# Altium PCB aucma_tranfer.PcbDoc
Units mm, origin at the board's own origin, x right, y up, seen from the top; angles counter-clockwise.
Board outline 96.43 x 140.34 mm, 2 copper layers (Top Layer, Bottom Layer); 69 components, 73 nets, 222 pads, 82 vias.
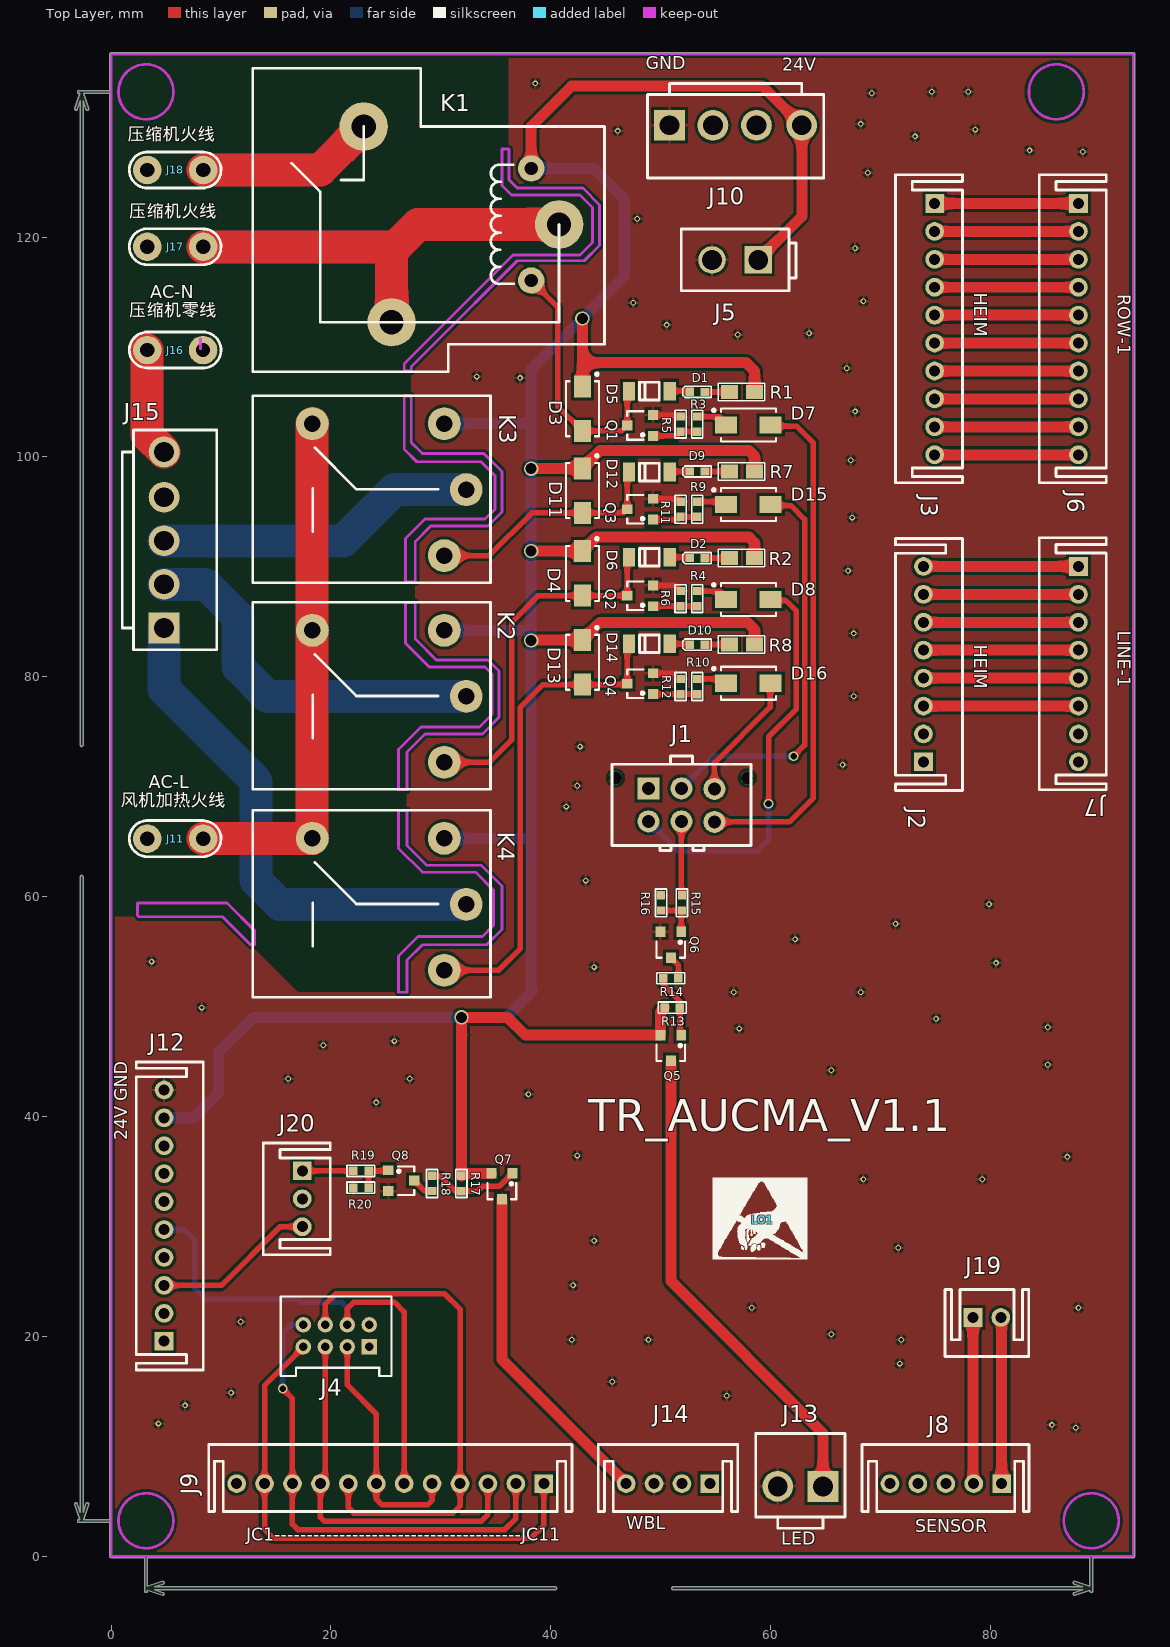
[diagram p0: Top Layer view]
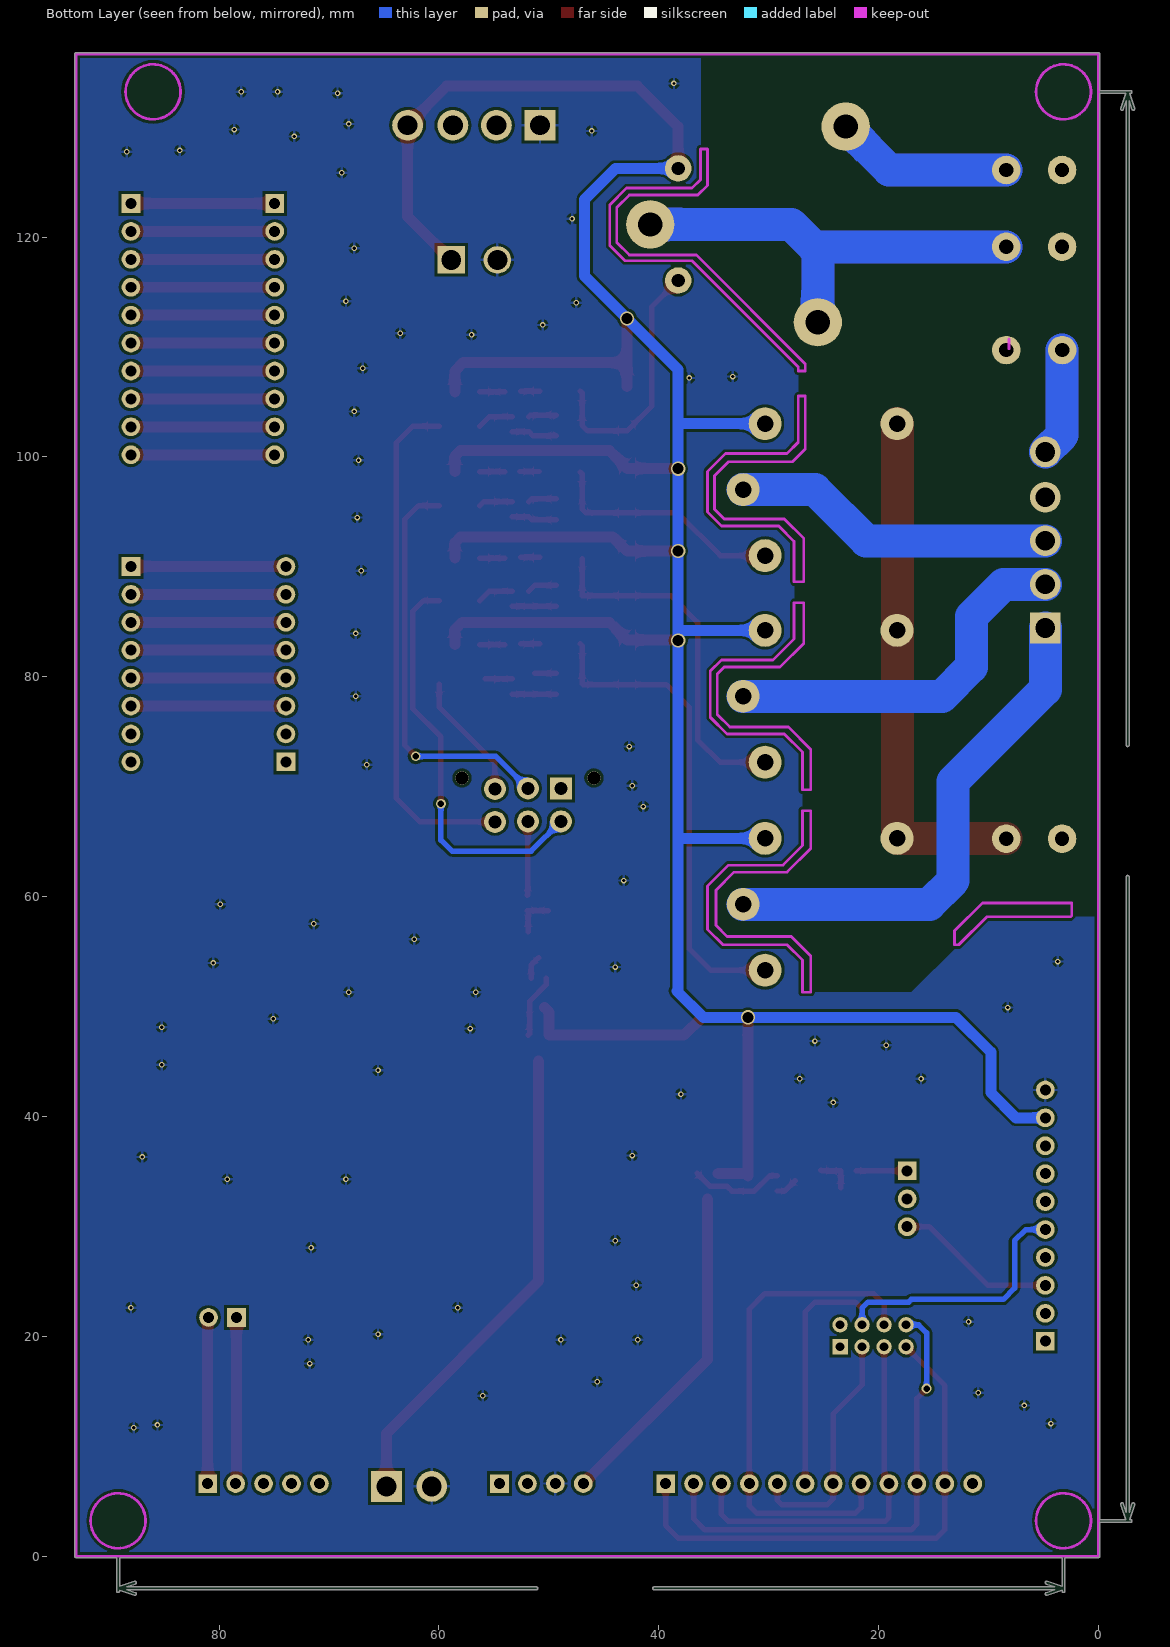
[diagram p1: Bottom Layer view, seen from below]

## Layer stack, top to bottom
Top Solder: solder mask 0.0102, Solder Resist, Dk 3.5
Top Layer: signal copper 0.0356
Dielectric 1: dielectric 0.32, FR-4, Dk 4.8
Bottom Layer: signal copper 0.0356
Bottom Solder: solder mask 0.0102, Solder Resist, Dk 3.5

## Board outline
-2.844,3.328 -3.296,4.685 cw(c-3.175,4.725) -3.054,4.765 -2.794,3.986 -2.794,61.802 cw(c-2.667,61.802) -2.54,61.802 -2.54,3.986 -2.28,4.765 cw(c-2.159,4.725) -2.032,4.725 cw(c-2.159,4.725) -2.038,4.685 -2.49,3.328 -0.127,3.328 -0.127,133.073 -2.49,133.073 -2.038,131.717 cw(c-2.159,131.677) -2.032,131.677 cw(c-2.159,131.677) -2.28,131.637 -2.54,132.416 -2.54,73.787 cw(c-2.667,73.787) -2.794,73.787 -2.794,132.416 -3.054,131.637 cw(c-3.175,131.677) -3.296,131.717 -2.844,133.073 -2.921,133.073 cw(c-2.921,133.201) -2.921,133.328 -0.127,133.328 -0.127,136.652 cw(c0,136.652) 0,136.779 93,136.779 cw(c93,136.652) 93.127,136.652 93.127,0 cw(c93,0) 93,-0.127 89.307,-0.127 89.307,-3.175 cw(c89.18,-3.175) 89.053,-3.175 89.053,-3.098 87.696,-3.55 cw(c87.656,-3.429) 87.616,-3.308 88.395,-3.048 51.129,-3.048 cw(c51.129,-2.921) 51.129,-2.794 88.395,-2.794 87.616,-2.534 cw(c87.656,-2.413) 87.696,-2.292 89.053,-2.744 89.053,-0.127 3.302,-0.127 3.302,-2.744 4.659,-2.292 cw(c4.699,-2.413) 4.826,-2.413 cw(c4.699,-2.413) 4.739,-2.534 3.96,-2.794 40.413,-2.794 cw(c40.413,-2.921) 40.541,-2.921 cw(c40.413,-2.921) 40.413,-3.048 3.96,-3.048 4.739,-3.308 cw(c4.699,-3.429) 4.826,-3.429 cw(c4.699,-3.429) 4.659,-3.55 3.302,-3.098 3.302,-3.175 cw(c3.175,-3.175) 3.048,-3.175 3.048,-0.127 0,-0.127 cw(c0,0) -0.127,0 -0.127,3.073 -2.921,3.073 cw(c-2.921,3.201) -2.921,3.328

## Design rules (kind name [scope] priority, off if disabled: settings)
Clearance [All] p1: gap=0.254
PolygonConnect [All] p1: connectstyle=Relief reliefconductorwidth=0.254 reliefentries=4 polygonreliefangle="90 Angle" airgapwidth=0.254
RoutingVias [All] p1: holewidth=0.3 width=0.5 viastyle="Through Hole" minholewidth=0.3 minwidth=0.5 maxholewidth=3.5 maxwidth=5
SolderMaskExpansion [All] p1: expansion=0.102
Width [All] p1: maxlimit=5 minlimit=0.254 preferedwidth=0.254
30 further rules are at their usual default settings.

## Components (designator, comment, footprint, x,y, rotation, side; value= is the part's Value field where it differs from the comment)
D1 "蓝色LED" 0603_D 53.34,105.918 r180 top
D2 "绿色LED" 0603_D 53.34,90.805 r180 top
D3 "SS34" SMA/DO214AC#1 42.883,104.394 r270 top
D4 "SS34" SMA/DO214AC#1 42.883,89.408 r270 top
D5 "1N4148" LL34_2P 48.133,106.172 r180 top
D6 "1N4148" LL34_2P 48.133,91.059 r180 top
D7 "1N4007" SMA/DO214AC#2 58.293,104.013 r180 top
D8 "1N4007" SMA/DO214AC#2 58.293,88.138 r180 top
D9 "红色LED" 0603_D 53.34,98.679 r180 top
D10 "黄色LED" 0603_D 53.34,82.931 r180 top
D11 "SS34" SMA/DO214AC#2 43.983,96.647 r90 top
D12 "1N4148" LL34_2P 48.133,98.806 r180 top
D13 "SS34" SMA/DO214AC#2 43.983,81.026 r90 top
D14 "1N4148" LL34_2P 48.133,83.185 r180 top
D15 "1N4007" SMA/DO214AC#2 58.293,96.774 r180 top
D16 "1N4007" SMA/DO214AC#2 58.293,80.518 r180 top
J1 "DIP-2*3" С5557-2*3A 48.895,69.85 r0 top
J2 "SIP-8-BLUE" XHB-8A 73.914,72.263 r90 top
J3 "SIP-10-BLUE" XHB-10A 74.93,123.063 r270 top
J4 "DIP-2*4" PHB-2*4A 18.161,14.097 r180 top
J5 "DIP-2*1" 5557-2*1A 54.864,117.983 r270 top
J6 "SIP-10" XHB-10A 88.011,123.063 r270 top
J7 "SIP-8" XHB-8A 88.011,90.043 r270 top
J8 "SIP-5-RED" XHB-5A 81.026,6.604 r180 top
J9 "SIP-12" XHB-12A 39.37,6.604 r180 top
J10 "SIP-4" VH3.96-4A 50.8,130.175 r0 top
J11 "SIP-2" "positioning crimp terminals" 3.302,65.278 r0 top
J12 "SIP-10-RED" XHB-10A 4.826,19.558 r90 top
J13 "SIP-2" VH3.96-2A 64.77,6.35 r180 top
J14 "SIP-4" XHB-4A 54.483,6.604 r180 top
J15 "SIP-5-RED" VH3.96-5A 4.826,100.457 r90 top
J16 "SIP-2" "positioning crimp terminals" 8.372,109.728 r180 top
J17 "SIP-2" "positioning crimp terminals" 3.302,119.126 r0 top
J18 "SIP-2" "positioning crimp terminals" 3.302,126.111 r0 top
J19 "SIP-2-BLUE" XHB-2A 78.613,21.717 r0 top
J20 "SIP-3" XHB-3A 17.399,35.052 r270 top
K1 "Relay-SPST" SLA-24VDC-SL-A 40.767,121.158 r90 top
K2 "Relay-SPST" HF152FD-1H 32.318,78.232 r180 top
K3 "Relay-SPST" HF152FD-1H 32.318,97.028 r180 top
K4 "Relay-SPST" HF152FD-1H 32.318,59.309 r180 top
LO1 "LOGO" THAND 59.309,30.607 r0 top
Q1 "BC817-40" SOT-23-3 48.133,102.87 r90 top
Q2 "BC817-40" SOT-23-3 48.133,87.376 r90 top
Q3 "BC817-40" SOT-23-3 48.133,95.25 r90 top
Q4 "BC817-40" SOT-23-3 48.133,79.375 r90 top
Q5 "AO3401" SOT-23-3 50.927,46.228 r180 top
Q6 "BC817-40" SOT-23-3 50.927,55.626 r180 top
Q7 "AO3401" SOT-23-3 35.56,33.655 r180 top
Q8 "BC817-40" SOT-23-3 26.416,34.163 r270 top
R1 "4.7KΩ/1%" 0805_R 56.261,105.918 r0 top
R2 "4.7KΩ/1%" 0805_R 56.261,90.805 r0 top
R3 "4.7KΩ/1%" 0603_R 53.34,102.997 r270 top
R4 "4.7KΩ/1%" 0603_R 53.34,87.122 r270 top
R5 "100KΩ/1%" 0603_R 51.816,102.997 r270 top
R6 "100KΩ/1%" 0603_R 51.816,87.122 r270 top
R7 "4.7KΩ/1%" 0805_R 56.261,98.679 r0 top
R8 "4.7KΩ/1%" 0805_R 56.261,82.931 r0 top
R9 "4.7KΩ/1%" 0603_R 53.34,95.25 r270 top
R10 "4.7KΩ/1%" 0603_R 53.34,79.121 r270 top
R11 "100KΩ/1%" 0603_R 51.816,95.25 r270 top
R12 "100KΩ/1%" 0603_R 51.816,79.121 r270 top
R13 "2.2KΩ/1%" 0603_R 51.054,49.911 r0 top
R14 "4.7KΩ/1%" 0603_R 50.927,52.578 r180 top
R15 "4.7KΩ/1%" 0603_R 51.943,59.436 r270 top
R16 "100KΩ/1%" 0603_R 50.038,59.436 r270 top
R17 "2.2KΩ/1%" 0603_R 31.877,33.909 r270 top
R18 "4.7KΩ/1%" 0603_R 29.21,33.909 r90 top
R19 "4.7KΩ/1%" 0603_R 22.733,35.052 r0 top
R20 "100KΩ/1%" 0603_R 22.733,33.528 r0 top

## Footprints (in the part's own frame and the unit in brackets; to place one, negate y for a bottom-side part, rotate by r counter-clockwise, add the part's x,y. Pads: shape width x height; smd on the part's side, far side on the other; paste and mask are expansions set on the pad)
0603_D [mil] "贴片发光二极管"
  rect 30x30 smd: 1(-27,0) 2(27.5,-0.06)
  silkscreen extent -50,-20 52,20
0603_R [mil] "电阻"
  rect 30x30 smd: 1(-27,0) 2(27.5,-0.06)
  silkscreen extent -50,-20 50,20
0805_R [mil] "电阻"
  rect 60x50 smd: 1(0.11,0.06) 2(90.11,0.06)
  silkscreen extent -39,-31 126,32
5557-2*1A [mm] "直针-引脚间距4.2mm"
  rect 2.5x2.5 hole 1.8: 1(0.051,4.013)
  round 2.5 hole 1.8: 2(0.051,-0.187)
  silkscreen extent -2.75,-2.99 2.85,7.44
HF152FD-1H [mm] "宏发功率继电器20A,1组常开"
  round 3 hole 1.5: 1(0,0) 2(14,-6) 3(2,6) 4(2,-6)
  silkscreen extent -2.2,-8.55 19.43,8.47
LL34_2P [mil]
  rect 44x66.93 smd: 1(-106,7) 2(40,7)
  silkscreen extent -68,-24 2,38
PHB-2*4A [mm] "直针-引脚间距2.0mm"
  rect 1.4x1.4 hole 0.8: 1(-5.334,-4.953)
  round 1.4 hole 0.8: 2(-3.334,-4.953) 3(-1.334,-4.953) 4(0.666,-4.953) 5(-5.334,-6.953) 6(-3.334,-6.953) 7(-1.334,-6.953) 8(0.666,-6.953)
  silkscreen extent -7.37,-9.53 2.72,-2.29
"positioning crimp terminals" [mm] "6.3mm带定位线路板冷压接插片"
  round 2.6 hole 1.3: 1(0,0) 2(5.08,0)
  silkscreen extent -1.64,-1.64 6.71,1.64
SLA-24VDC-SL-A [mm] "松乐功率继电器[常开A型]"
  round 4.4 hole 2.2: 1(8.9,17.78) 2(-8.9,15.24) 2(0,0)
  round 2.4 hole 1.2: 3(-5.1,2.54) 4(5.1,2.54)
  silkscreen extent -13.4,-4.12 14.2,27.88
SMA/DO214AC#1 [mm] "二极管"
  rect 2x1.55 smd: 1(2.025,0) 2(-2.025,0)
  silkscreen extent -3.27,-1.5 2.5,1.5, body extent -2.5,-1.5 2.5,1.5, height 2.69
SMA/DO214AC#2 [mm] "二极管"
  rect 2x1.55 smd: 1(-1.725,1.1) 2(2.325,1.1)
  silkscreen extent -2.2,-0.4 3.57,2.6, body extent -2.2,-0.4 2.8,2.6, height 2.69
SOT-23-3 [mm]
  rect 0.9x0.95 smd: 1(-0.95,-1.175) 2(0.95,-1.175) 3(0,1.175)
  silkscreen extent -1.3,-0.35 1.3,1.18
THAND [mm]
  silkscreen extent -4.57,-3.56 4.01,3.81
VH3.96-2A [mm] "直针-引脚间距3.96"
  rect 2.8x2.8 hole 1.8: 1(0,0)
  round 2.8 hole 1.8: 2(4.12,0)
  silkscreen extent -2,-4.8 6.12,3.8
VH3.96-4A [mm] "直针-引脚间距3.96"
  rect 2.8x2.8 hole 1.8: 1(0,0)
  round 2.8 hole 1.8: 2(3.962,0) 3(7.922,0) 4(12.042,0)
  silkscreen extent -2,-4.8 14.04,3.8
VH3.96-5A [mm] "直针-引脚间距3.96"
  rect 2.8x2.8 hole 1.8: 1(-16.002,0)
  round 2.8 hole 1.8: 2(-12.042,0) 3(-8.08,0) 4(-4.12,0) 5(0,0)
  silkscreen extent -18,-4.8 2,3.8
XHB-2A [mm] "直针-引脚间距2.54mm"
  rect 1.7x1.7 hole 1: 1(-0.2,0)
  round 1.7 hole 1: 2(2.34,0)
  silkscreen extent -2.74,-3.56 4.88,2.54
XHB-3A [mm] "直针-引脚间距2.54mm"
  rect 1.7x1.7 hole 1: 1(0,0)
  round 1.7 hole 1: 2(2.54,0) 3(5.08,0)
  silkscreen extent -2.54,-3.56 7.62,2.54
XHB-4A [mm] "直针-引脚间距2.54mm"
  rect 1.7x1.7 hole 1: 1(0,0)
  round 1.7 hole 1: 2(2.54,0) 3(5.08,0) 4(7.62,0)
  silkscreen extent -2.54,-3.56 10.16,2.54
XHB-5A [mm] "直针-引脚间距2.54mm"
  rect 1.7x1.7 hole 1: 1(0,0)
  round 1.7 hole 1: 2(2.54,0) 3(5.08,0) 4(7.62,0) 5(10.16,0)
  silkscreen extent -2.49,-3.56 12.7,2.54
XHB-8A [mm] "直针-引脚间距2.54mm"
  rect 1.7x1.7 hole 1: 1(0,0)
  round 1.7 hole 1: 2(2.54,0) 3(5.08,0) 4(7.62,0) 5(10.16,0) 6(12.7,0) 7(15.24,0) 8(17.78,0)
  silkscreen extent -2.62,-3.56 20.32,2.54
XHB-10A [mm] "直针-引脚间距2.54mm"
  rect 1.7x1.7 hole 1: 1(0,0)
  round 1.7 hole 1: 2(2.54,0) 3(5.08,0) 4(7.62,0) 5(10.16,0) 6(12.7,0) 7(15.24,0) 8(17.78,0) 9(20.32,0) 10(22.86,0)
  silkscreen extent -2.62,-3.56 25.4,2.54
XHB-12A [mm] "直针-引脚间距2.54mm"
  rect 1.7x1.7 hole 1: 1(0,0)
  round 1.7 hole 1: 2(2.54,0) 3(5.08,0) 4(7.62,0) 5(10.16,0) 6(12.7,0) 7(15.24,0) 8(17.78,0) 9(20.32,0) 10(22.86,0) 11(25.4,0) 12(27.94,0)
  silkscreen extent -2.57,-3.56 30.48,2.54
С5557-2*3A [mm] "直针-引脚间距3.0mm"
  rect 2x2 hole 1.2: 1(0,0)
  round 2 hole 1.2: 2(3,0) 3(6,-0.05) 4(0,-3) 5(3,-3) 6(6,-3.05)
  round 1.2 hole 1.2 unplated: ""(-3,0.951) ""(8.998,0.951)
  silkscreen extent -3.33,-5.65 9.33,2.95

## Part data
D1 D2 D9 D10: library part LED, "发光二极管"
D3 D4 D5 D6 D7 D8 D11 D12 D13 D14 D15 D16: library part Diodes, "二极管"
J1: "双排2*3P插座"
J2: library part SIP-8, "单排8P插座"
J3 J12: library part SIP-10, "单排10P插座"
J4: "双排2*4P插座"
J5: "双排2*1P插座"
J6: "单排10P插座"
J7: "单排8P插座"
J8 J15: library part SIP-5, "单排5P插座"
J9: "单排12P插座"
J10 J14: "单排4P插座"
J11 J13 J16 J17 J18: "单排2P插座"
J19: library part SIP-2, "单排2P插座"
J20: "单排3P插座"
K1 K2 K3 K4: "继电器 1组常开(单刀单掷)"
LO1: "百兴Logo"
Q1 Q2 Q3 Q4 Q6 Q8: library part NPN, "三极管"
Q5 Q7: library part MOSFET_P, "P-Channel MOSFET"
R1 R2 R3 R4 R5 R6 R7 R8 R9 R10 R11 R12 R13 R14 R15 R16 R17 R18 R19 R20: library part RES2, "电阻"

## Via types
v1: diameter 0.5, hole 0.3, Top Layer to Bottom Layer, tented both sides, 74 vias
v2: diameter 1.3, hole 1, Top Layer to Bottom Layer, tented both sides, 5 vias
v3: diameter 0.9, hole 0.6, Top Layer to Bottom Layer, tented both sides, 3 vias

## Nets (pads, with @x,y where several pads share a name; then routed paths per layer and width w, separated by ;. In a path a pad name is that pad's centre, name@x,y a point inside that pad or via, vN(x,y) a via of type N, cw(c..) or ccw(c..) an arc to the next point about the centre after c; other vN are vias at no path point)
24V: D3.2 D4.2 D11.2 D13.2 J5.1 J10.4 J12.9 K1.4 K2.4 K3.4 K4.4 Q5.2 Q7.2 R1.2 R2.2 R7.2 R8.2 R13.1 R17.1 | length 325.2
  Top Layer w1: 31.909,47.403 31.877,47.371 ; Q7.2 32.112,34.83 R17.1 31.877,47.371 ; v2(38.227,83.312) 38.266,83.351 D13.2 44.495,84.963 57.912,84.963 58.55,84.325 R8.2 ; v2(38.227,91.44) 38.234,91.433 D4.2 44.16,92.71 58.039,92.71 58.55,92.199 R2.2 ; v2(38.227,98.933) 38.266,98.972 D11.2 44.495,100.584 58.039,100.584 58.55,100.073 R7.2 ; K1.4 38.227,130.048 41.91,133.731 59.286,133.731 J10.4 62.842,121.897 J5.1 ; D3.2 42.883,108.585 ; v2(42.883,112.606) 42.883,108.585 ; R13.1 49.977,49.52 Q5.2 37.687,47.403 36.068,49.022 v2(31.877,49.022) 31.877,47.371 ; R1.2 58.55,107.82 57.785,108.585 42.883,108.585
  Bottom Layer w1: J12.9 7.493,39.878 9.779,42.164 9.779,45.847 12.954,49.022 v2(31.877,49.022) 35.941,49.022 38.354,51.435 38.227,51.562 38.227,65.405 ; K4.4 38.131,65.309 38.227,65.405 ; K2.4 38.196,84.232 ; K3.4 38.131,103.028 ; K1.4 43.922,126.258 46.736,123.444 46.736,116.459 v2(42.883,112.606) 38.227,107.95 v2(38.227,98.933) v2(38.227,91.44) v2(38.227,83.312) 38.227,65.405
COLD_LIVE: J17.2 K1.2 | length 80.5
  Top Layer w3: J17.2 25.908,119.126 ; K1.2@25.527,112.258 25.527,118.745 25.908,119.126 ; K1.2@40.767,121.158 27.94,121.158 25.908,119.126
  Bottom Layer w3: J17.2 25.908,119.126 ; K1.2@25.527,112.258 25.527,118.745 25.908,119.126 ; K1.2@40.767,121.158 27.94,121.158 25.908,119.126
COLD_NE: J15.5 J16.2 | length 19.8
  Top Layer w3: J16.2 3.292,101.991 J15.5
  Bottom Layer w3: J16.2 3.292,101.991 J15.5
COLD_PWR: J18.2 K1.1 | length 32.5
  Top Layer w3: J18.2 19.04,126.111 K1.1
  Bottom Layer w3: J18.2 19.04,126.111 K1.1
COLD_SIG: D7.1 J1.6 | length 46.7
  Top Layer w0.5: J1.6 61.72,66.8 63.865,68.945 63.865,101.311 62.357,102.819 D7.1@59.969,102.819
DOOR: J12.6
DROP_24V: J14.4 Q7.3 | length 30.6
  Top Layer w1: Q7.3 35.56,17.907 J14.4
DROP_EN: J20.1 R19.1 | length 4.6
  Top Layer w0.5: J20.1 R19.1
DROP_SIG: J12.3 J20.3 | length 14.8
  Top Layer w0.5: J12.3 10.033,24.638 15.367,29.972 J20.3
FOG_PWR: J15.2 K2.1 | length 34.4
  Bottom Layer w3: J15.2 8.613,88.415 11.557,85.471 11.557,80.899 14.224,78.232 K2.1
FOG_SIG: D8.1 J1.4 | length 37.1
  Top Layer w0.5: v3(59.817,68.453) 59.817,74.549 62.357,77.089 62.357,85.979 61.392,86.944 D8.1@59.969,86.944
  Bottom Layer w0.5: J1.4 51.61,64.135 58.801,64.135 59.817,65.151 v3(59.817,68.453)
GND: J5.2 J10.1 J12.10 J13.2 J14.3 Q1.2 Q2.2 Q3.2 Q4.2 Q6.2 Q8.2 R5.1 R6.1 R11.1 R12.1 R16.1 R20.1 | length 10.3
  Top Layer w0.3: Q1.2 Q1.2@49.572,103.556
  Top Layer w0.5: Q4.2 51.298,80.325 ; Q2.2 51.298,88.326 R6.1 ; Q3.2 51.552,96.2 R11.1 ; Q1.2 51.679,103.82 R5.1
  other v1: 87.757,11.684 85.598,11.938 4.318,12.065 6.731,13.716 56.007,14.605 10.922,14.859 45.593,15.875 71.755,17.526 41.91,19.685 48.895,19.685 71.882,19.685 65.532,20.193 11.811,21.336 58.293,22.606 88.011,22.606 42.037,24.638 71.628,28.067 43.942,28.702 68.453,34.29 79.248,34.29 86.995,36.322 42.418,36.449 24.13,41.275 37.973,42.037 16.129,43.434 27.178,43.434 65.532,44.196 85.217,44.704 19.304,46.482 25.781,46.863 57.15,48.006 85.217,48.133 75.057,48.895 8.255,49.911 56.642,51.308 68.199,51.308 43.942,53.594 80.518,53.975 3.683,54.102 62.23,56.134 71.374,57.531 79.883,59.309 43.18,61.468 41.402,68.199 42.418,70.104 66.548,72.009 42.672,73.66 67.564,78.232 67.564,83.947 67.056,89.662 67.437,94.488 67.31,99.695 67.691,104.14 37.211,107.188 33.274,107.315 66.929,108.077 57.023,111.125 63.5,111.252 50.546,112.014 47.498,114.046 68.453,114.173 67.691,118.999 47.879,121.666 68.834,125.857 88.392,127.762 83.566,127.889 73.152,129.159 46.101,129.667 78.613,129.794 68.199,130.302 69.215,133.096 74.676,133.223 77.978,133.223 38.608,133.985
HOT_PWR: J15.3 K3.1 | length 29.4
  Bottom Layer w3: J15.3 21.13,92.377 25.781,97.028 K3.1
HOT_SIG: D15.1 J1.2 | length 37
  Top Layer w0.5: D15.1@59.969,95.58 61.849,95.58 63.111,94.318 63.111,73.779 v3(62.103,72.771)
  Bottom Layer w0.5: J1.2 54.816,72.771 v3(62.103,72.771)
HOT_WIND_LIVE: J11.2 K2.2 K3.2 K4.2 | length 47.7
  Top Layer w3: J11.2 18.287,65.278 18.287,102.997 K3.2
LED_PWR: J13.1 Q5.3 | length 44.4
  Top Layer w1: Q5.3 50.927,25.019 64.77,11.176 J13.1
LED_SIG: J1.5 R15.1 | length 6.7
  Top Layer w0.5: J1.5 51.895,60.17 R15.1
MOTOR_GND1: J2.8 J7.1 | length 14.1
  Top Layer w1: J2.8 J7.1
MOTOR_GND2: J2.7 J7.2 | length 14.1
  Top Layer w1: J2.7 J7.2
MOTOR_GND3: J2.6 J7.3 | length 14.1
  Top Layer w1: J2.6 J7.3
MOTOR_GND4: J2.5 J7.4 | length 14.1
  Top Layer w1: J2.5 J7.4
MOTOR_GND5: J2.4 J7.5 | length 14.1
  Top Layer w1: J2.4 J7.5
MOTOR_GND6: J2.3 J7.6 | length 14.1
  Top Layer w1: J2.3 J7.6
MOTOR_GND7: J2.2
MOTOR_GND8: J2.1
MOTOR_PWR1: J3.1 J6.1 | length 13.1
  Top Layer w1: J3.1 J6.1
MOTOR_PWR2: J3.2 J6.2 | length 13.1
  Top Layer w1: J3.2 J6.2
MOTOR_PWR3: J3.3 J6.3 | length 13.1
  Top Layer w1: J3.3 J6.3
MOTOR_PWR4: J3.4 J6.4 | length 13.1
  Top Layer w1: J3.4 J6.4
MOTOR_PWR5: J3.5 J6.5 | length 13.1
  Top Layer w1: J3.5 J6.5
MOTOR_PWR6: J3.6 J6.6 | length 13.1
  Top Layer w1: J3.6 J6.6
MOTOR_PWR7: J3.7 J6.7 | length 13.1
  Top Layer w1: J3.7 J6.7
MOTOR_PWR8: J3.8 J6.8 | length 13.1
  Top Layer w1: J3.8 J6.8
MOTOR_PWR9: J3.9 J6.9 | length 13.1
  Top Layer w1: J3.9 J6.9
MOTOR_PWR10: J3.10 J6.10 | length 13.1
  Top Layer w1: J3.10 J6.10
NetD1_1: D1.1 R1.1 | length 2.2
  Top Layer w0.5: D1.1 56.262,105.918 R1.1
NetD1_2: D1.2 D5.1 | length 1.8
  Top Layer w0.254: D1.2@52.567,105.994 D1.2
  Top Layer w0.5: D5.1 D1.2@52.567,105.994
NetD2_1: D2.1 R2.1 | length 2.2
  Top Layer w0.5: D2.1 R2.1@56.262,90.805
NetD2_2: D2.2 D6.1 | length 1.7
  Top Layer w0.5: D6.1 D2.2@52.567,90.881
NetD3_1: D3.1 D5.2 K1.3 Q1.3 | length 23.1
  Top Layer w0.5: K1.3 40.64,113.645 40.64,104.612 D3.1 46.457,102.369 Q1.3 46.958,105.835 D5.2
NetD4_1: D4.1 D6.2 K2.3 Q2.3 | length 32.5
  Top Layer w0.5: K2.3 34.417,72.232 36.449,74.264 36.449,84.963 38.869,87.383 D4.1 46.951,87.383 Q2.3 D6.2@46.958,90.722
NetD7_2: D7.2 R3.1 | length 3.3
  Top Layer w0.5: R3.1 55.397,103.683 D7.2@56.261,102.819
NetD8_2: D8.2 R4.1 | length 3.3
  Top Layer w0.5: R4.1 55.397,87.808 D8.2@56.261,86.944
NetD9_1: D9.1 R7.1 | length 2.2
  Top Layer w0.5: D9.1 56.262,98.679 R7.1
NetD9_2: D9.2 D12.1 | length 1.8
  Top Layer w0.5: D12.1@50.878,98.681 D9.2
NetD10_1: D10.1 R8.1 | length 2.2
  Top Layer w0.5: D10.1 R8.1@56.262,82.931
NetD10_2: D10.2 D14.1 | length 1.7
  Top Layer w0.5: D14.1 D10.2@52.567,83.007
NetD11_1: D11.1 D12.2 K3.3 Q3.3 | length 21.8
  Top Layer w0.5: K3.3 34.386,91.028 38.28,94.922 D11.1 46.63,94.922 Q3.3 46.958,98.469 D12.2
NetD13_1: D13.1 D14.2 K4.3 Q4.3 | length 44
  Top Layer w0.5: K4.3 35.275,53.309 37.211,55.245 37.211,77.216 39.296,79.301 D13.1 46.884,79.301 Q4.3 46.958,82.848 D14.2
NetD15_2: D15.2 R9.1 | length 3.1
  Top Layer w0.5: R9.1 55.905,95.936 D15.2@56.261,95.58
NetD16_2: D16.2 R10.1 | length 2.4
  Top Layer w0.5: R10.1 D16.2@55.778,79.807
NetQ1_1: Q1.1 R3.2 R5.2 | length 4.5
  Top Layer w0.254: Q1.1 Q1.1@49.56,102.171
  Top Layer w0.5: Q1.1 51.436,101.92 R5.2 R3.2
NetQ2_1: Q2.1 R4.2 R6.2 | length 4
  Top Layer w0.5: Q2.1 R4.2@53.336,86.426
NetQ3_1: Q3.1 R9.2 R11.2 | length 4.1
  Top Layer w0.5: Q3.1 51.563,94.3 R11.2 R9.2
NetQ4_1: Q4.1 R10.2 R12.2 | length 4
  Top Layer w0.5: Q4.1 R10.2@53.336,78.425
NetQ5_1: Q5.1 R13.2 R14.2 | length 5.9
  Top Layer w0.5: R14.2 50.228,52.006 51.752,50.482 R13.2 51.752,47.528 Q5.1
NetQ6_1: Q6.1 R15.2 R16.2 | length 3.9
  Top Layer w0.5: R16.2 R15.2 51.877,58.673 Q6.1
NetQ6_3: Q6.3 R14.1 | length 2.2
  Top Layer w0.5: Q6.3 51.613,53.765 R14.1
NetQ7_1: Q7.1 R17.2 R18.2 | length 8.5
  Top Layer w0.5: R18.2 29.909,34.608 31.305,33.21 R17.2 33.337,33.21 33.782,33.655 35.335,33.655 Q7.1
NetQ8_1: Q8.1 R19.2 R20.2 | length 3.4
  Top Layer w0.5: R20.2 R19.2 25.178,35.05 Q8.1
NetQ8_3: Q8.3 R18.1 | length 2
  Top Layer w0.5: Q8.3 28.531,33.223 R18.1
SIG1: J4.4 J9.1 J9.11 | length 48.1
  Top Layer w0.5: J4.4 13.97,15.525 13.97,2.413 14.732,1.651 38.227,1.651 39.37,2.794 J9.1
SIG2: J4.8 J9.2 J9.10 | length 44.1
  Top Layer w0.5: v3(15.621,15.24) 16.51,14.351 J9.10 16.51,2.913 17.018,2.405 35.814,2.405 36.83,3.421 J9.2
  Bottom Layer w0.5: v3(15.621,15.24) 15.621,20.32 16.351,21.05 J4.8
SIG3: J4.3 J9.3 J9.9 | length 34.5
  Top Layer w0.5: J4.3 19.495,7.049 J9.9 19.05,3.54 19.431,3.159 33.655,3.159 34.29,3.794 J9.3
  Bottom Layer w0.5: J9.9@19.05,6.35 J9.9 ; J4.3@19.431,18.986 J4.3
SIG4: J4.7 J9.4 J9.8 | length 45.8
  Top Layer w0.5: J4.7 19.495,22.924 20.447,23.876 30.353,23.876 31.75,22.479 J9.4 31.75,4.572 31.091,3.913 22.098,3.913 21.59,4.421 J9.8
SIG5: J4.2 J9.5 J9.7 | length 21.9
  Top Layer w0.5: J4.2 21.495,15.589 24.13,12.954 J9.7 24.13,5.207 24.67,4.667 28.797,4.667 29.21,5.08 J9.5
SIG6: J4.6 J9.6 J12.5 | length 46.6
  Top Layer w0.5: J4.6 21.495,22.519 22.098,23.122 25.781,23.122 26.67,22.233 J9.6
  Bottom Layer w0.5: J12.5 6.604,29.718 7.62,28.702 7.62,24.384 8.636,23.368 17.018,23.368 17.272,23.114 20.955,23.114 21.495,22.574 J4.6
SIG7: J4.1
SIG8: J4.5
TEMP_IN: J8.2 J19.1 | length 15.1
  Top Layer w1: J19.1 78.413,6.677 J8.2
TEMP_OUT: J8.1 J19.2 | length 15.1
  Top Layer w1: J19.2 81.026,21.644 J8.1
WIND_PWR: J15.1 K4.1 | length 46.5
  Bottom Layer w3: J15.1 4.826,78.867 13.208,70.485 13.208,61.468 15.367,59.309 K4.1
WIND_SIG: D16.1 J1.3 | length 11.6
  Top Layer w0.5: J1.3 54.895,72.167 59.969,77.241 D16.1@59.969,79.324
pads on no net: J1. J1.1 J7.7 J7.8 J8.3 J8.4 J8.5 J9.12 J10.2 J10.3 J11.1 J12.1 J12.2 J12.4 J12.7 J12.8 J14.1 J14.2 J15.4 J16.1 J17.1 J18.1 J20.2

## Polygon pours and split planes (outlines as drawn)
GND on Top Layer "GND" (solid, remove dead copper, pour order 4): 36.195,128.016 36.195,136.652 93,136.652 93,0 0,0 0,58.166 10.16,58.166 12.7,55.626 16.637,51.689 17.018,51.308 26.162,51.308 26.924,51.308 26.924,54.229 28.321,55.626 34.163,55.626 35.56,57.023 35.56,60.96 33.655,62.865 28.702,62.865 26.924,64.643 26.924,73.152 28.575,74.803 33.782,74.803 35.306,76.327 35.306,80.518 34.29,81.534 29.591,81.534 27.686,83.439 27.686,92.329 29.083,93.726 34.29,93.726 35.56,94.996 35.56,98.679 33.909,100.33 28.321,100.33 27.305,101.346 27.305,108.204 36.957,117.856 43.053,117.856 44.45,119.253 44.45,122.936 42.926,124.46 36.957,124.46 36.195,125.222 36.195,136.652
GND on Bottom Layer "GND" (solid, remove dead copper, pour order 3): 36.195,128.016 36.195,136.652 93,136.652 93,0 0,0 0,58.166 10.16,58.166 12.7,55.626 16.637,51.689 17.018,51.308 26.162,51.308 26.924,51.308 26.924,54.229 28.321,55.626 34.163,55.626 35.56,57.023 35.56,60.96 33.655,62.865 28.702,62.865 26.924,64.643 26.924,73.152 28.575,74.803 33.782,74.803 35.306,76.327 35.306,80.518 34.29,81.534 29.591,81.534 27.686,83.439 27.686,92.329 29.083,93.726 34.29,93.726 35.56,94.996 35.56,98.679 33.909,100.33 28.321,100.33 27.305,101.346 27.305,108.204 36.957,117.856 43.053,117.856 44.45,119.253 44.45,122.936 42.926,124.46 36.957,124.46 36.195,125.222 36.195,136.652

## Keep-outs
Keep-Out Layer:
  circle w0.254: c86,133.223 r2.5
  circle w0.254: c89.18,3.223 r2.5
  circle w0.254: c3.175,3.223 r2.5
  circle w0.254: c3.175,133.223 r2.5
  lines w0.254: 8.128,109.855 8.128,110.744 ; 26.162,64.389 28.321,62.23 33.147,62.23 34.798,60.579 34.798,57.404 33.782,56.388 27.94,56.388 26.162,54.61 26.162,51.308 26.924,51.308 26.924,54.229 28.321,55.626 34.163,55.626 35.56,57.023 35.56,60.96 33.655,62.865 28.702,62.865 26.924,64.643 26.924,67.818 26.162,67.818 26.162,64.516 ; 27.559,88.646 26.797,88.646 26.797,92.583 28.575,94.361 34.036,94.361 34.925,95.25 34.925,98.298 33.655,99.568 27.813,99.568 26.67,100.711 26.67,105.537 27.305,105.537 27.305,101.346 28.321,100.33 33.909,100.33 35.56,98.679 35.56,94.996 34.29,93.726 29.083,93.726 27.686,92.329 27.686,88.646 ; 37.465,118.364 42.672,118.364 43.815,119.507 43.815,122.301 43.815,122.682 42.672,123.825 37.592,123.825 36.449,123.825 35.56,124.714 35.56,128.016 36.195,128.016 36.195,125.222 36.957,124.46 42.418,124.46 42.926,124.46 44.45,122.936 44.45,119.253 43.053,117.856 36.957,117.856 29.21,110.109 27.305,108.204 27.305,107.823 26.67,107.823 26.67,108.458 36.576,118.364 38.735,118.364 ; 0,0 0,136.652 93,136.652 93,0 0,0 ; 2.413,58.293 2.54,58.166 6.985,58.166 10.16,58.166 12.7,55.626 13.081,55.626 13.081,56.261 13.081,56.896 10.541,59.436 2.413,59.436 2.413,58.293 ; 26.162,69.723 26.924,69.723 26.924,73.152 28.575,74.803 33.782,74.803 35.306,76.327 35.306,80.518 34.29,81.534 29.591,81.534 27.686,83.439 27.686,86.741 26.797,86.741 26.797,83.058 28.956,80.899 34.036,80.899 34.671,80.264 34.671,76.581 33.528,75.438 28.194,75.438 26.162,73.406 26.162,72.39 26.162,69.723

## Silkscreen, mask and mechanical layers (free items; w line width, h text height)
Top Overlay:
  text "GND" at 48.641,134.874 h2
  text "24V" at 61.087,134.747 h2
  text "压缩机火线" at 1.524,128.397 h2
  text "压缩机火线" at 1.651,121.412 h2
  text "HEIM" at 78.105,114.935 h2 r270
  text "ROW-1" at 91.186,114.808 h2 r270
  text "AC-N" at 3.556,114.046 h2
  text "压缩机零线" at 1.651,112.395 h2
  text "LINE-1" at 91.186,84.201 h2 r270
  text "HEIM" at 78.105,82.931 h2 r270
  text "AC-L" at 3.429,69.469 h2
  text "风机加热火线" at 0.889,67.818 h2
  text "GND" at 1.905,41.402 h2 r90
  text "24V" at 1.905,37.846 h2 r90
  text "TR_AUCMA_V1.1" at 43.434,37.719 h5
  text "WBL" at 46.863,2.032 h2
  text "SENSOR" at 73.152,1.778 h2
  text "JC1--------------------------------------JC11" at 12.319,1.016 h2
  text "LED" at 60.96,0.635 h2

## Dimensions
0,0 to 93,0 on Keep-Out Layer
89.18,1.905 to 3.175,1.524 on Keep-Out Layer
1.397,133.201 to 0.508,3.201 on Keep-Out Layer
0,0 to 0,136.652 on Keep-Out Layer